# Altium PCB F1-chip.PcbDoc
Units mil, origin at the board's own origin, x right, y up, seen from the top; angles counter-clockwise.
Board outline 1181.1 x 1133.14 mil, 4 copper layers (Top Layer, GND, Signal & VCC, Bottom Layer), stack 23.756 mil thick; 61 components, 75 nets, 305 pads, 84 vias.
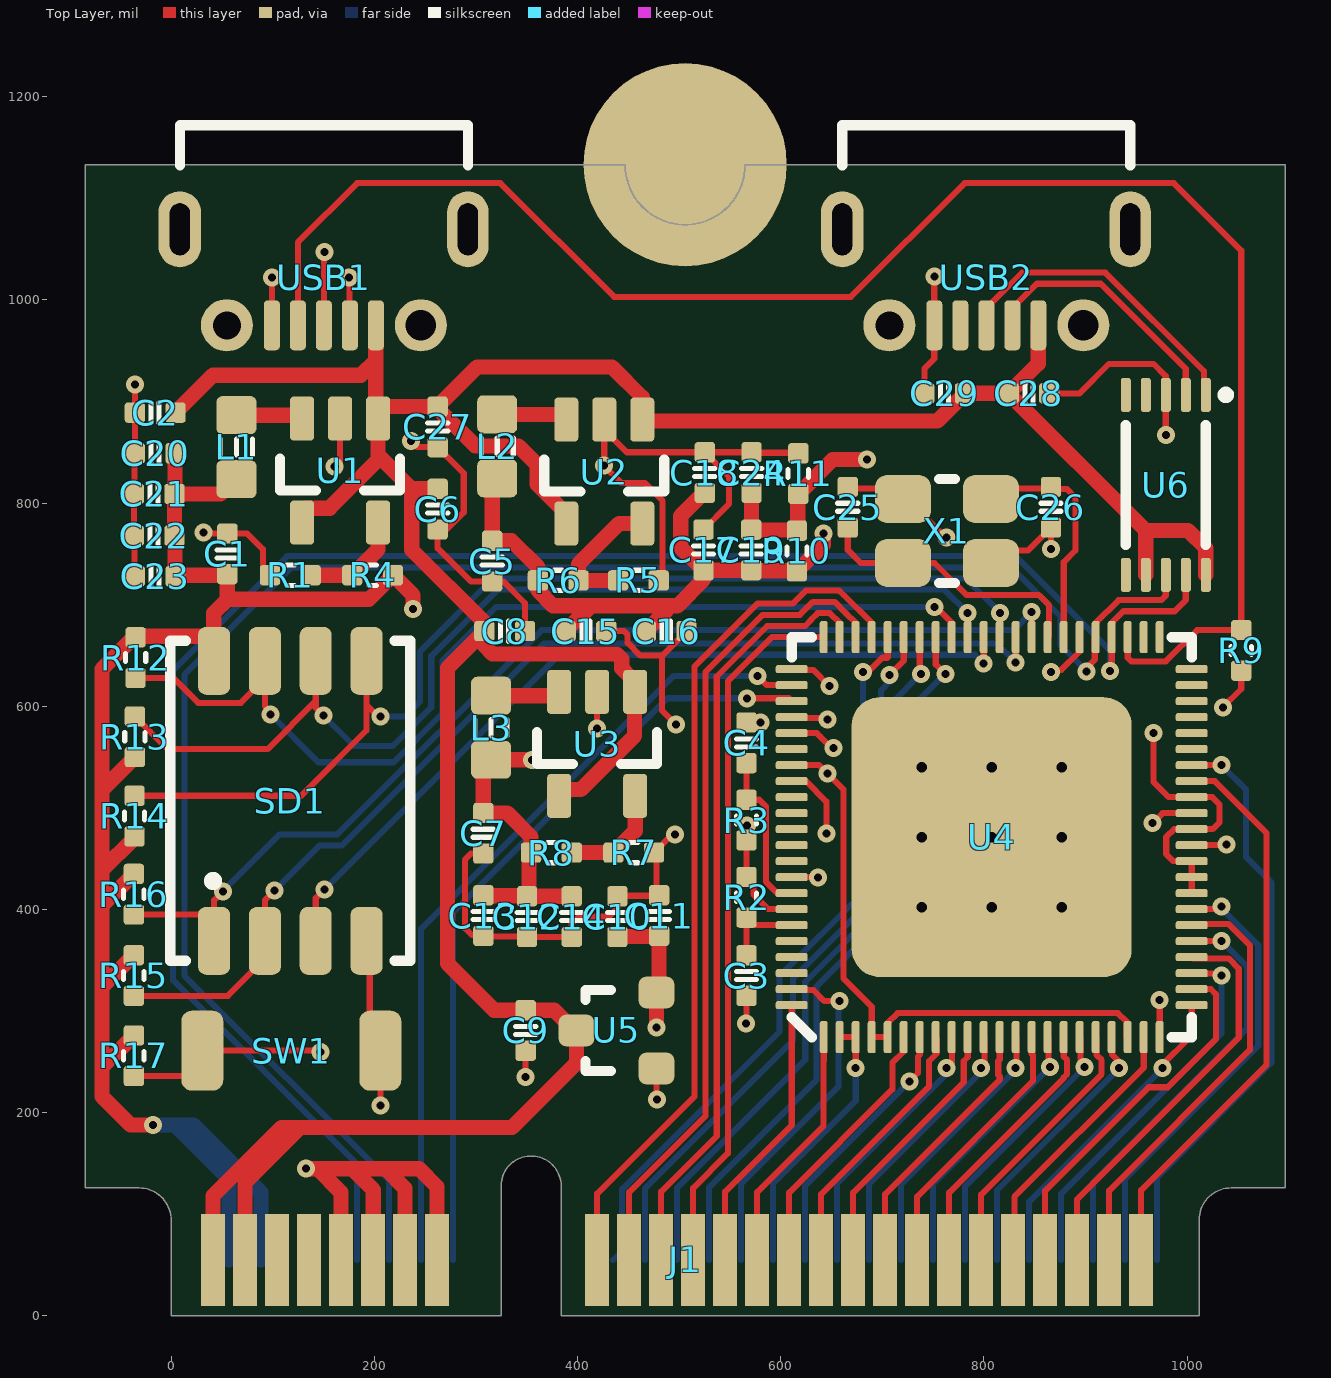
[diagram p0: Top Layer view]
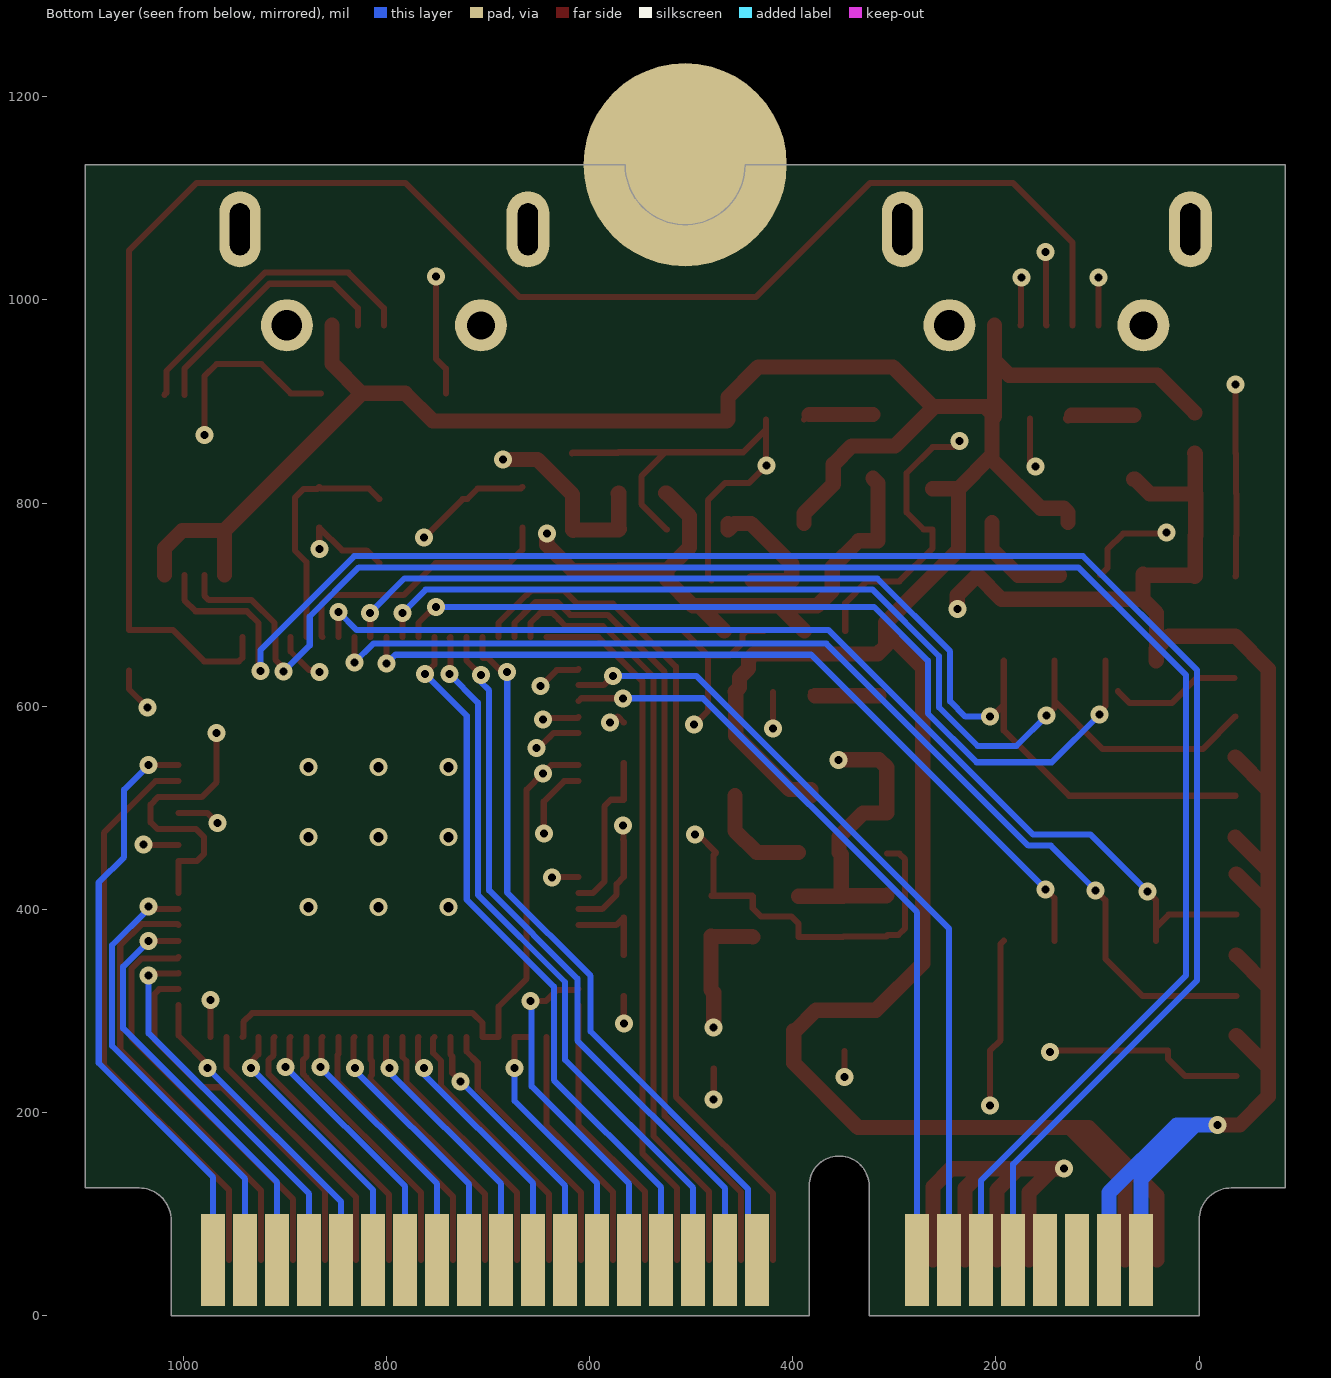
[diagram p1: Bottom Layer view, seen from below]
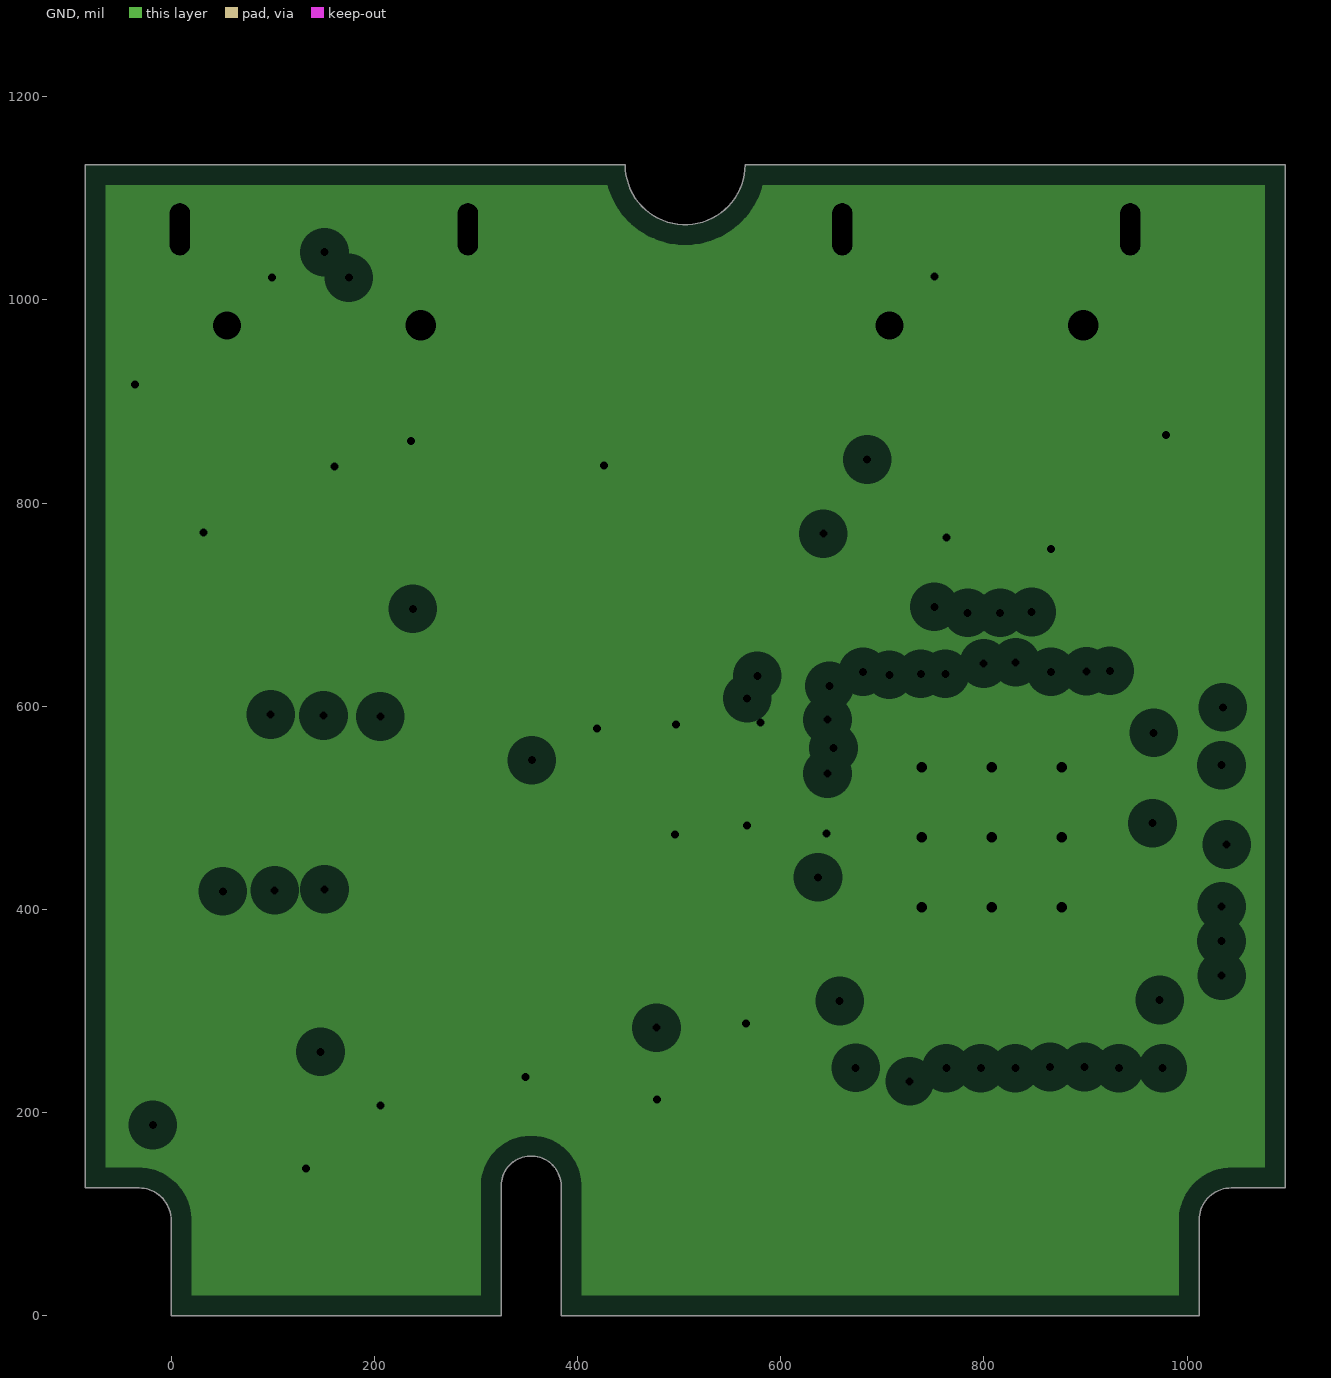
[diagram p2: GND, clearances drawn from the general rule]
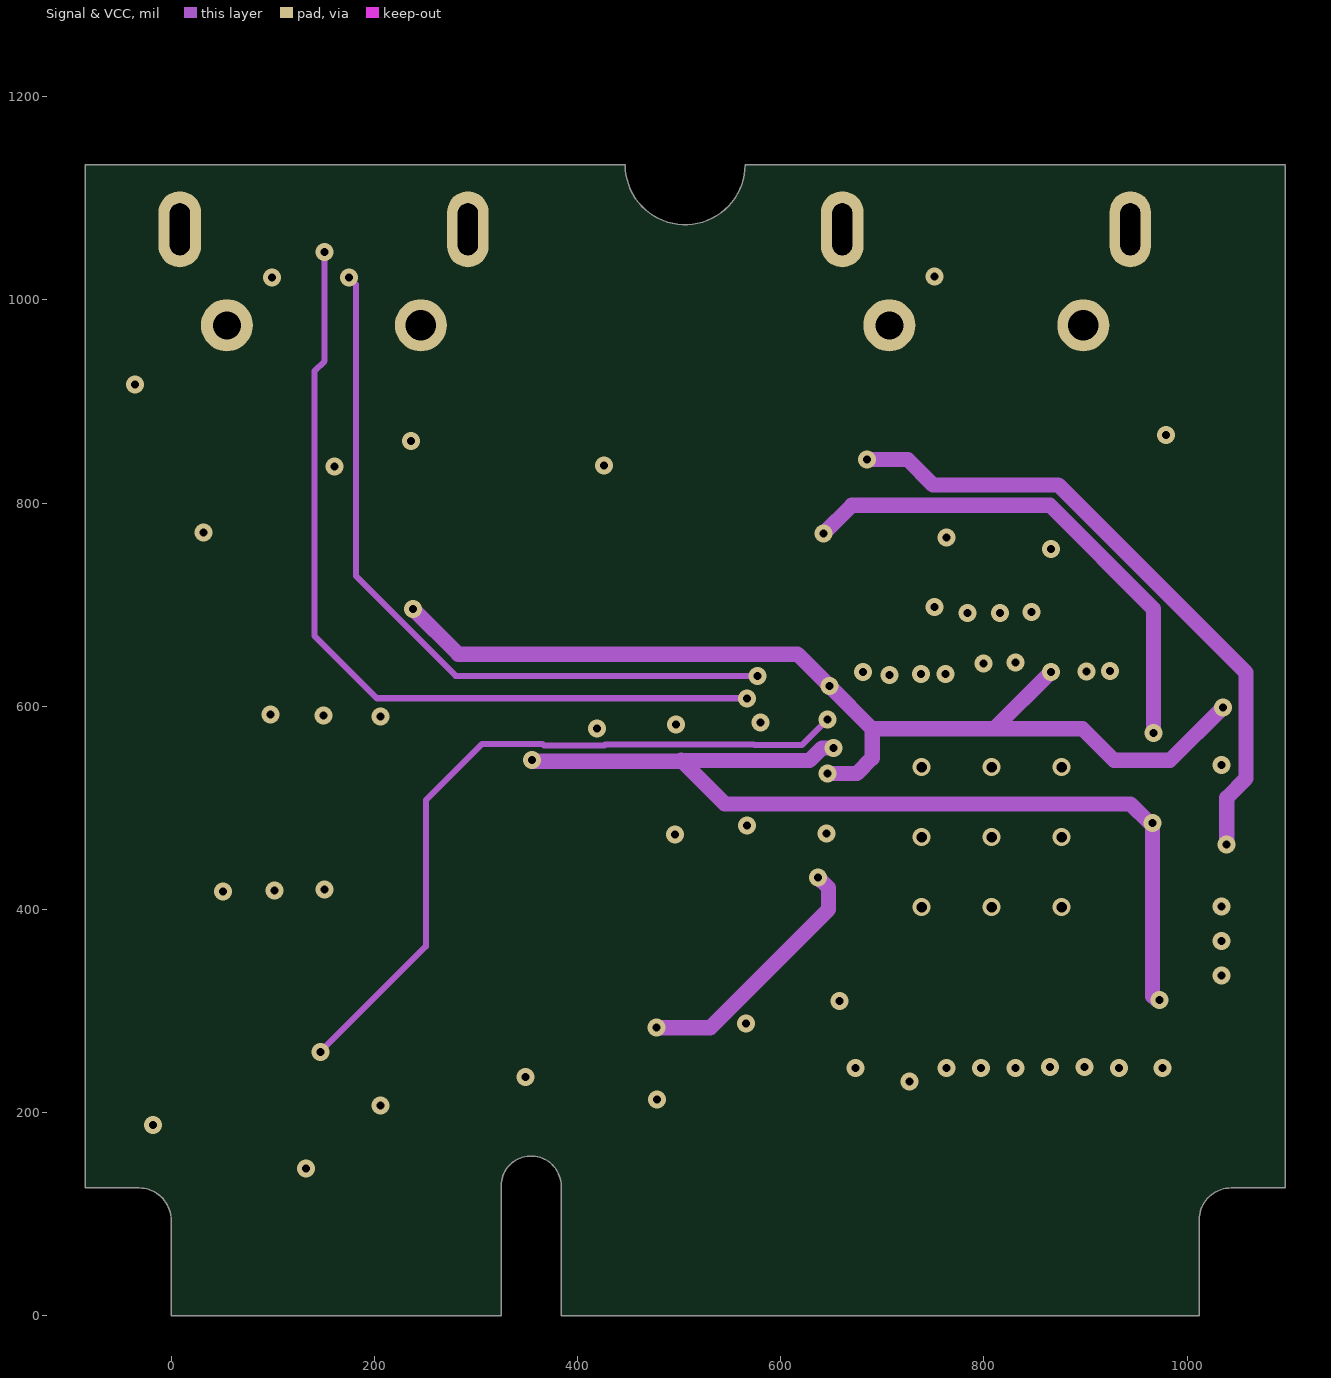
[diagram p3: Signal & VCC]

## Layer stack, top to bottom
Top Solder: solder mask 0.4, Solder Resist, Dk 3.5
Top Layer: signal copper 1.4
Dielectric 2: prepreg 2.8, PP-006, Dk 4.1
GND: plane copper 1.3778, net GND
Dielectric 1: dielectric 12.6, FR-4, Dk 4.8
Signal & VCC: signal copper 1.3778
Dielectric 3: prepreg 2.8, PP-006, Dk 4.1
Bottom Layer: signal copper 1.4
Bottom Solder: solder mask 0.4, Solder Resist, Dk 3.5

## Board outline
0,0 0,94.49 ccw(c-31.5,94.49) -31.5,125.98 -84.65,125.98 -84.65,1133.14 446.85,1133.14 ccw(c505.91,1133.14) 564.96,1133.14 1096.46,1133.14 1096.46,1131.99 1096.46,125.98 1043.31,125.98 ccw(c1043.31,94.49) 1011.81,94.49 1011.81,0 383.86,0 383.86,127.95 ccw(c354.33,127.95) 324.8,127.95 324.8,0

## Design rules (kind name [scope] priority, off if disabled: settings)
Clearance [All] p1: gap=5 ignorepadtopadclearanceinfootprint=FALSE
DiffPairsRouting [All] p1: maxlimit=10 minlimit=3.5 mostfreqgap=3.5 toplayer_minwidth=3.5 toplayer_maxwidth=20 toplayer_prefwidth=15 midlayer1_minwidth=3.5 midlayer1_maxwidth=20 midlayer1_prefwidth=15 bottomlayer_minwidth=3.5 bottomlayer_maxwidth=20 bottomlayer_prefwidth=15 maxuncoupledlength=500
HoleSize [All] p1: absolutevalues=TRUE maxlimit=100 minlimit=7.87 maxpercent=80.000 minpercent=20.000
PlaneClearance [All] p1: clearance=20
PlaneConnect [All] p1: planeconnectstyle=Direct reliefexpansion=20 reliefentries=4 reliefconductorwidth=10 reliefairgap=10
PolygonConnect [All] p1: connectstyle=Relief reliefconductorwidth=10 reliefentries=4 polygonreliefangle="90 Angle" airgapwidth=10
RoutingVias [All] p1: holewidth=7.87 width=17.72 viastyle="Through Hole" minholewidth=7.87 minwidth=17.72 maxholewidth=28 maxwidth=50
SolderMaskExpansion [All] p1: expansion=1
Width [All] p1: maxlimit=20 minlimit=3.5 preferedwidth=6
26 further rules are at their usual default settings.

## Components (designator, comment, footprint, x,y, rotation, side; value= is the part's Value field where it differs from the comment)
C1 "10uF" CAP_0402 55.33,750.12 r90 top
C2 "10uF" CAP_0402 -15.67,889.12 r180 top
C3 "10uF" CAP_0402 566.33,335.12 r270 top
C4 "10uF" CAP_0402 566.33,564.12 r90 top
C5 "10uF" CAP_0402 316,743 r270 top
C6 "10uF" CAP_0402 262.33,794.12 r270 top
C7 "10uF" CAP_0402 307.33,475.12 r270 top
C8 "10uF" CAP_0402 328.33,674.12 r0 top
C9 "4.7uF" CAP_0402 349,281 r90 top
C10 "10uF" CAP_0402 439.33,393.12 r270 top
C11 "0.1uF" CAP_0402 480.33,394.12 r270 top
C12 "0.1uF" CAP_0402 350.33,393.12 r90 top
C13 "0.1uF" CAP_0402 307.33,394.12 r90 top
C14 "0.1uF" CAP_0402 394.33,393.12 r90 top
C15 "10uF" CAP_0402 408.33,674.12 r180 top
C16 "1uF" CAP_0402 487.33,674.12 r180 top
C17 "0.1uF" CAP_0402 524,754 r270 top
C18 "0.1uF" CAP_0402 525.33,830.12 r270 top
C19 "0.1uF" CAP_0402 571,754 r270 top
C20 "0.1uF" CAP_0402 -15.67,849.12 r0 top
C21 "0.1uF" CAP_0402 -16.67,809.12 r0 top
C22 "0.1uF" CAP_0402 -16.67,768.12 r0 top
C23 "0.1uF" CAP_0402 -15.67,728.12 r0 top
C24 "0.1uF" CAP_0402 571.33,830.12 r270 top
C25 "15pF" CAP_0402 666,796 r270 top
C26 "15pF" CAP_0402 866,796 r270 top
C27 "1uF" CAP_0402 262.33,875.12 r270 top
C28 "10uF" CAP_0402 844.33,908.12 r0 top
C29 "0.1uF" CAP_0402 761.33,908.12 r180 top
J1 "mini PCI-E" "mini PCI-E" 354.33,55.12 r0 top
L1 "2.2uH" IND_0603 64.33,855.12 r270 top
L2 "2.2uH" IND_0603 321,856 r270 top
L3 "2.2uH" IND_0603 315,579 r270 top
R1 "150K" RES_0402 117.33,729.12 r0 top
R2 "200K" RES_0402 566.33,412.12 r90 top
R3 "200K" RES_0402 566.33,488.12 r270 top
R4 "680K" RES_0402 198.33,729.12 r0 top
R5 "150K" RES_0402 460,724 r180 top
R6 "470K" RES_0402 381,724 r180 top
R7 "150K" RES_0402 455.33,456.12 r180 top
R8 "150K" RES_0402 374.33,456.12 r180 top
R9 "10K" RES_0402 1053.33,655.12 r90 top
R10 "2.2K" RES_0402 616,753 r270 top
R11 "2.2K" RES_0402 617.33,829.12 r270 top
R12 "10K" RES_0402 -35,648 r90 top
R13 "10K" RES_0402 -35.67,570.12 r270 top
R14 "10K" RES_0402 -36,492 r270 top
R15 "10K" RES_0402 -36.67,335.12 r90 top
R16 "10K" RES_0402 -36.67,415.12 r90 top
R17 "10K" RES_0402 -36.67,256.12 r90 top
SD1 "SD NAND" "SD NAND" 117.33,507.12 r90 top
SW1 "贴片按钮" BUTTON2 118.33,261.12 r180 top
U1 "SY8088AAC" SY8088AAC 166.33,832.12 r270 top
U2 "SY8088AAC" SY8088AAC 426.33,831.12 r270 top
U3 "SY8088AAC" SY8088AAC 419.33,563.12 r270 top
U4 "全志F1c200s" F1c200s 807.7,471.27 r90 top
U5 "XC6206-3.0V" XC6206 477.74,281 r270 top
U6 "CH340E" CH340E 979,818 r270 top
USB1 "MicroUSB" MicroUSB 150.33,975.12 r180 top
USB2 "MicroUSB" MicroUSB 802.33,975.12 r180 top
X1 "24MHz Crystal" SMD3225 763.64,772.62 r180 top

## Footprints (in the part's own frame and the unit in brackets; to place one, negate y for a bottom-side part, rotate by r counter-clockwise, add the part's x,y. Pads: shape width x height; smd on the part's side, far side on the other; paste and mask are expansions set on the pad)
BUTTON2 [mm] "3*4*2两脚小龟贴片按钮"
  rrect50% 1.05x2 smd mask+0.076: 1(-2.225,0) 2(2.225,0)
CAP_0402 [mil] "0402 Capacitor"
  rrect30% 20x20 smd mask+2.99: 1(-20,0) 2(20,0)
  silkscreen extent -4,-10 4,10
CH340E [mm] "MSOP-10"
  rrect50% 0.85x0.25 smd mask+0.076: 1(-2.25,1) 2(-2.25,0.5) 3(-2.25,0) 4(-2.25,-0.5) 5(-2.25,-1) 6(2.25,-1) 7(2.25,-0.5) 8(2.25,0) 9(2.25,0.5) 10(2.25,1)
  silkscreen extent -2.33,-1 1.5,1.58
F1c200s [mm] "QFN-88"
  rrect50% 0.8x0.2 smd mask+0.076: 1(-5,4.2) 2(-5,3.8) 3(-5,3.4) 4(-5,3) 5(-5,2.6) 6(-5,2.2) 7(-5,1.8) 8(-5,1.4) 9(-5,1) 10(-5,0.6) 11(-5,0.2) 12(-5,-0.2) 13(-5,-0.6) 14(-5,-1) 15(-5,-1.4) 16(-5,-1.8) 17(-5,-2.2) 18(-5,-2.6) 19(-5,-3) 20(-5,-3.4) 21(-5,-3.8) 22(-5,-4.2) 45(5,-4.2) 46(5,-3.8) 47(5,-3.4) 48(5,-3) 49(5,-2.6) 50(5,-2.2) 51(5,-1.8) 52(5,-1.4) 53(5,-1) 54(5,-0.6) 55(5,-0.2) 56(5,0.2) 57(5,0.6) 58(5,1) 59(5,1.4) 60(5,1.8) 61(5,2.2) 62(5,2.6) 63(5,3) 64(5,3.4) 65(5,3.8) 66(5,4.2)
  rrect50% 0.2x0.8 smd mask+0.076: 23(-4.2,-5) 24(-3.8,-5) 25(-3.4,-5) 26(-3,-5) 27(-2.6,-5) 28(-2.2,-5) 29(-1.8,-5) 30(-1.4,-5) 31(-1,-5) 32(-0.6,-5) 33(-0.2,-5) 34(0.2,-5) 35(0.6,-5) 36(1,-5) 37(1.4,-5) 38(1.8,-5) 39(2.2,-5) 40(2.6,-5) 41(3,-5) 42(3.4,-5) 43(3.8,-5) 44(4.2,-5) 67(4.2,5) 68(3.8,5) 69(3.4,5) 70(3,5) 71(2.6,5) 72(2.2,5) 73(1.8,5) 74(1.4,5) 75(1,5) 76(0.6,5) 77(0.2,5) 78(-0.2,5) 79(-0.6,5) 80(-1,5) 81(-1.4,5) 82(-1.8,5) 83(-2.2,5) 84(-2.6,5) 85(-3,5) 86(-3.4,5) 87(-3.8,5) 88(-4.2,5)
  rrect20% 7x7 smd mask+0.076: 89(0,0)
  silkscreen extent -5,-5 5,5
IND_0603 [mm] "0603 Inductor"
  rrect30% 0.95x1 smd mask+0.076: 1(-0.8,0) 2(0.8,0)
  silkscreen extent -0.2,-0.4 0.2,0.4
MicroUSB [mm] "MicroUSB"
  oval 1.03x1.9 hole 1.3 slot 0.5 at 0 deg mask+0.076: 0(-3.6,-2.4)
  round 1.3 hole 0.762 mask+0.076: 0(-2.425,0)
  round 1.3 hole 0.7 mask+0.076: 0(2.425,0)
  oval 1.07x1.9 hole 1.3 slot 0.5 at 0 deg mask+0.076: 0(3.6,-2.4)
  rrect50% 0.4x1.25 smd mask+0.076: 1(-1.3,0) 2(-0.65,0) 3(0,0) 4(0.65,0) 5(1.3,0)
  silkscreen extent -3.6,-5 3.6,-4
"mini PCI-E" [mm] "mini PCI-E"
  rect 0.6x2.3 smd mask+0.076: 1(-7.95,0) 3(-7.15,0) 5(-6.35,0) 7(-5.55,0) 9(-4.75,0) 11(-3.95,0) 13(-3.15,0) 15(-2.35,0) 17(1.65,0) 19(2.45,0) 21(3.25,0) 23(4.05,0) 25(4.85,0) 27(5.65,0) 29(6.45,0) 31(7.25,0) 33(8.05,0) 35(8.85,0) 37(9.65,0) 39(10.45,0) 41(11.25,0) 43(12.05,0) 45(12.85,0) 47(13.65,0) 49(14.45,0) 51(15.25,0)
  rect 0.6x2.3 smd far side mask+0.076: 2(-7.55,0) 4(-6.75,0) 6(-5.95,0) 8(-5.15,0) 10(-4.35,0) 12(-3.55,0) 14(-2.75,0) 16(-1.95,0) 16(-1.95,0) 18(2.05,0) 18(2.05,0) 20(2.85,0) 22(3.65,0) 24(4.45,0) 26(5.25,0) 28(6.05,0) 30(6.85,0) 32(7.65,0) 34(8.45,0) 36(9.25,0) 38(10.05,0) 40(10.85,0) 42(11.65,0) 44(12.45,0) 46(13.25,0) 48(14.05,0) 50(14.85,0) 52(15.65,0)
RES_0402 [mil] "0402 Resistor"
  rrect30% 20x20 smd mask+2.99: 1(-20,0) 2(20,0)
  silkscreen extent -4,-10 4,10
"SD NAND" [mm] "SD NAND"
  rrect50% 1.7x0.8 smd mask+0.076: 1(-3.5,1.905) 1(-3.5,1.905) 2(-3.5,0.635) 3(-3.5,-0.635) 4(-3.5,-1.905) 5(3.5,-1.905) 5(3.5,-1.905) 6(3.5,-0.635) 7(3.5,0.635) 8(3.5,1.905)
  silkscreen extent -4,-3 4,3
SMD3225 [mm] "SMD3225 Crystal"
  rrect50% 1.4x1.2 smd mask+0.076: 1(-1.1,-0.8) 2(1.1,-0.8) 3(1.1,0.8) 4(-1.1,0.8)
  silkscreen extent -0.2,-1.3 0.2,1.3
SY8088AAC [mm] "SY8088AAC"
  rrect30% 1.1x0.6 smd mask+0.07: 1(-1.3,0.95) 2(-1.3,0) 3(-1.3,-0.95) 4(1.3,-0.95) 5(1.3,0.95)
  silkscreen extent -0.3,-1.5 0.5,1.5
XC6206 [mm] "SOT23"
  rrect50% 0.8x0.9 smd: 1(0.95,0) 2(-0.95,0) 3(0,-2)
  silkscreen extent -1.02,-1.78 1.02,-1.14

## Part data
C1 C2 C3 C4 C5 C6 C7 C8 C10 C15 C28: library part CAP_0402_10uF, "0402"
C9: library part CAP_0402_4.7uF, "0402"
C11 C12 C13 C14 C17 C18 C19 C20 C21 C22 C23 C24 C29: library part CAP_0402_0.1uF, "0402"
C16 C27: library part CAP_0402_1uF, "0402"
C25 C26: library part CAP_0402_15pF, "0402"
L1 L2 L3: library part IND_0603_2.2uH, "0603"
R1 R5 R7 R8: library part RES_0402_150K, "0402"
R2 R3: library part RES_0402_200K, "0402"
R4: library part RES_0402_680K, "0402"
R6: library part RES_0402_470K, "0402"
R9 R12 R13 R14 R15 R16 R17: library part RES_0402_10K, "0402"
R10 R11: library part RES_0402_2.2K, "0402"
SW1: "3*4*2两脚小龟贴片按钮"
U1 U2 U3: "SOT23-5"
U4: library part F1c200s, "MQFN-88"
U5: "SOT23-3"
U6: "MSOP-10"
X1: "SMD3225"

## Free pads (board coordinates)
  round 200 smd: PAD(505.91,1133.14)
  round 200 smd far side: PAD(505.91,1133.14)

## Via types
v1: diameter 17.72, hole 7.87, Top Layer to Bottom Layer, 75 vias
v2: diameter 17.72, hole 10, Top Layer to Bottom Layer, tented both sides, 9 vias

## Nets (pads, with @x,y where several pads share a name; then routed paths per layer and width w, separated by ;. In a path a pad name is that pad's centre, name@x,y a point inside that pad or via, vN(x,y) a via of type N, cw(c..) or ccw(c..) an arc to the next point about the centre after c; other vN are vias at no path point)
5VIN: C2.1 C6.1 C8.1 C9.2 C27.1 C28.1 C29.1 J1.1 J1.3 U1.1 U1.4 U2.1 U2.4 U3.1 U3.4 U5.3 U6.7 U6.10 USB1.1 USB2.1 | length 3479.3
  Top Layer w15: C2.1 41.21,926 187,926 201.51,940.51 ; J1.1 41.34,118.34 108.64,185.64 127,185.64 ; J1.3 72.83,131.23 127,185.4 127,185.64 ; U1.4 128.93,790.78 133.24,795.09 156.09,795.09 203.73,842.73 203.73,847.27 ; USB1.1 201.51,940.51 ; U1.1@203.73,888.31 210.54,895.12 C27.1 ; C6.1 236.88,814.12 ; U3.4 381.93,518.28 403.28,518.28 456,571 456,613.57 U3.1 452.42,618.61 452.42,628.45 443.64,637.23 443.64,646.33 438.35,651.62 316.38,651.62 308.33,659.67 C8.1 ; U2.4 388.93,789.78 360,818.71 360,838.28 341.99,856.3 299.42,856.3 262.33,893.39 C27.1 ; USB2.1 853.51,937.3 C28.1 ; U6.7 959.31,773.13 ; U6.10 1018.37,755.63 1000.87,773.13 959.31,773.13 ; 127,185.64 335.64,185.64 399,249 U5.3 397.03,281 377.03,301 C9.2 318,301 272,347 272,637.79 C8.1 ; 201.51,940.51 201.51,885.52 U1.1 203.73,847.27 ; 203.73,847.27 236.88,814.12 ; 236.88,814.12 236.88,754.12 308.33,682.67 C8.1 ; C27.1 301.21,934 434,934 463.73,904.27 U2.1 465.03,881 754.21,881 C29.1 C28.1 ; C28.1 959.31,773.13
+1V1: C7.1 C12.2 C13.2 C14.2 L3.2 R8.2 U4.22 U4.35 U4.71 | length 1397.5
  Top Layer w6: U4.71 635.53,573.63 639.02,570.14 639.09,570.14 650.23,559 v1(652,559) ; v1(966,485) 975.89,494.89 U4.35 ; U4.22 v1(973,311)
  Top Layer w15: C13.2 307.83,413.62 C12.2@349.83,413.62 ; v1(355,547) 354.5,547.5 L3.2 307.33,539.83 C7.1 330.88,495.12 354.33,471.67 R8.2 352.33,454.12 352.33,416.12 C12.2@349.83,413.62 ; C14.2 C12.2 C12.2@349.83,413.62
  Signal & VCC w15: v1(355,547) 356.03,545.97 500.97,545.97 502,547 502.36,546.64 ; v1(652,559) 640.79,559 628.44,546.64 502.36,546.64 ; v1(973,311) 970.36,311 966.85,314.51 966,314.51 v1(966,485) 963.36,485 944.36,504 545,504 502.36,546.64
+2V5: C5.1 C15.2 C16.2 C17.2 C18.2 C19.2 L2.2 R6.2 R10.2 U4.30 U4.31 U4.32 U4.34 U4.36 | length 1412.1
  Top Layer w6: v1(967,574) 967,525.41 981.78,510.64 U4.36 1024.77,510.64 1032,503.41 1032,486 1025.14,479.14 U4.34 987.14,479.14 979.49,471.49 979.49,454.51 986.35,447.65 U4.32 U4.31 U4.30
  Top Layer w15: L2.2 316,819.5 C5.1 335,763 361,737 R6.2 361,714 376,699 413.21,699 ; C15.2 413.21,699 ; C16.2 488,694.79 488,699 ; C18.2 524.2,810.12 501.5,787.42 501.5,756.5 C17.2 ; v1(642,770) 642,759 R10.2 615.5,733.5 571.5,733.5 C19.2 C17.2 ; 413.21,699 488,699 ; 488,699 498.21,699 524,724.79 C17.2
  Signal & VCC w15: v1(642,770) 670,798 865,798 967,696 v1(967,574)
+3V0: C10.2 C11.2 U4.80 U5.2 | length 412.2
  Top Layer w6: U4.80 636.6,431.9 v1(636.72,431.78)
  Top Layer w15: C10.2 439.83,373.62 479.83,373.62 C11.2 480.33,320.99 U5.2 v1(477.74,283.74)
  Signal & VCC w15: v1(477.74,283.74) 530.74,283.74 647,400 647,421.5 v1(636.72,431.78)
+3V3: C1.1 C20.2 C21.2 C22.2 C23.2 J1.2 J1.4 L1.2 R4.2 R9.1 R12.2 R13.2 R14.2 R15.2 R16.2 R17.2 SD1.8 U4.4 U4.5 U4.20 U4.50 U4.67 U4.73 | length 3527.3
  Top Layer w6: U4.73 637.87,542.13 v1(646,534) 661.87,518.13 661.87,332.13 689.59,304.41 U4.4 U4.5 705.34,288.52 714.99,298.17 931.91,298.17 940.62,289.45 940.62,275.36 U4.20 ; U4.67 611.79,635.69 632.31,635.69 v1(648,620) ; v1(866,634) 867.87,635.87 876.16,635.87 894.31,654.02 U4.50 ; v1(1035.24,599) 1053.33,617.09 R9.1
  Top Layer w15: -67.89,438.89 R14.2@-35.67,471.12 ; -67.39,324.39 R15.2 ; -66.89,404.89 R16.2 ; R17.2 -67.79,245 -68,245 ; R13.2 -68,517.79 ; v1(-18,188) -40,188 -68,216 -68,245 ; C20.2 3.83,848.62 3.83,809.62 C21.2 ; L1.2 63.02,823.62 48.51,809.12 C21.2 ; v1(238,696) 238,709.45 R4.2 194.54,705.33 55.33,705.33 ; -68,245 -68,517.79 ; -68,517.79 -68,636.79 -35.67,669.12 29.95,669.12 SD1.8@42,657.07 ; C21.2 C22.2 3.83,767.62 3.83,728.62 C23.2 5.33,729.12 54.33,729.12 C1.1 55.33,705.33 ; SD1.8@42,657.07 42.33,656.74 SD1.8 42,645.24 SD1.8@42,657.07 ; SD1.8@42,657.07 42,692 55.33,705.33
  Signal & VCC w15: v1(238,696) 282.64,651.36 616.64,651.36 v1(648,620) 690,578 ; v1(646,534) 675,534 690,549 690,578 ; v1(866,634) 810,578 ; v1(1035.24,599) 983.24,547 928,547 897,578 810,578 ; 690,578 810,578
  Bottom Layer w15: v1(-18,188) 4,188 ; J1.2 57.09,134.91 4,188 ; J1.4 88.58,121.42 22,188 4,188
D+: U6.1 USB2.3 | length 309.9
  Top Layer w6: USB2.3 802.33,991.85 837.48,1027 919.56,1027 1016.45,930.11 1016.45,908.5 U6.1
D-: U6.2 USB2.2 | length 257.9
  Top Layer w6: USB2.2 827.92,991.85 852.07,1016 915,1016 998.68,932.31 U6.2
DRAM_VREF_33: C19.1 C24.2 R10.1 R11.2 U4.33 | length 873.2
  Top Layer w6: U4.33 1004.85,463.7 1038.7,463.7 v1(1039,464)
  Top Layer w15: C19.1@570.5,774.5 C19.1 ; C24.2@571.83,809.62 C24.2 571.17,809.95 571.17,774.17 C19.1 ; v1(685,843) 651.21,843 R11.2 616.67,808.45 616.67,773.67 R10.1 615.5,773.5 571.5,773.5 C19.1
  Signal & VCC w15: v1(685,843) 725,843 750,818 873.28,818 1058,633.28 1058,529 1039,510 v1(1039,464)
GND: C1.2 C2.2 C3.2 C4.2 C5.2 C6.2 C7.2 C8.2 C9.1 C10.1 C11.1 C12.1 C13.1 C14.1 C15.1 C16.1 C17.1 C18.1 C20.1 C21.1 C22.1 C23.1 C24.1 C25.1 C26.2 C27.2 C28.2 C29.2 J1.9 J1.11 J1.13 J1.15 R1.1 R2.2 R3.2 R5.1 R7.1 R11.1 SD1.4 SW1.1 U1.2 U2.2 U3.2 U4.74 U4.82 U4.89 U5.1 U6.3 USB1.0 USB1.5 USB2.0 USB2.5 X1.2 X1.4 | length 3255.4
  Top Layer w6: C23.1 -36.17,728.62 -36.17,767.62 C22.1 C21.1 -36.17,809.62 -36.17,848.62 C20.1 C2.2 v1(-35.67,916.67) ; v1(32,771) 32.88,770.12 C1.2 74.88,770.12 90.33,754.67 90.33,736.12 R1.1 ; USB1.5 v1(99.15,1022.15) ; v1(161,836) 162,836 166.33,840.33 U1.2 ; SD1.4 195.46,366.19 195.46,271.58 SW1.1 206,261.05 v1(206,207) ; v1(236,861) 241.88,855.12 C27.2 288,829.45 288,791 271.12,774.12 C6.2 262.33,755.67 295,723 C5.2 327,723 348.33,701.67 C8.2 ; C7.2 295.12,455.12 289.33,449.33 289.33,381.67 296,375 306.45,375 C13.1 307.83,373.62 349.83,373.62 C12.1 C14.1 394.33,386.33 401,393 431,393 439.33,401.33 C10.1 439.83,413.62 479.83,413.62 477.83,415.62 477.83,453.62 R7.1 493.21,474 v1(496,474) ; v1(349,235) C9.1 ; v1(419.33,578.33) U3.2 ; U2.2 U2.2@426.33,872.46 ; C15.1 445.82,674.12 449.33,670.6 449.33,662.56 461.89,650 483.21,650 ; U5.1 477.74,213.26 v1(478,213) ; R5.1 483.54,727.54 483.54,802.83 466.37,820 443,820 v1(426,837) 426.33,837.33 U2.2@426.33,872.46 ; v1(497,582) 483.21,595.79 483.21,650 ; C16.1 483.21,650 ; C17.1 549,799 549,826.45 C18.1 ; v1(566,288) 566.33,288.33 C3.2 ; C4.2 572.33,590.12 578.45,584 v1(580,584) ; v1(567,483) 566.67,482.67 566.67,469.12 567,468.79 R3.2 R2.2 573.33,425.12 573.33,414.67 587.6,400.4 U4.82 ; U4.74 624.95,526.39 645,506.33 v1(645,475) v1@645,481 ; R11.1 616.83,849.62 571.83,849.62 C24.1 C18.1 ; C25.1 667.54,814.46 709.98,814.46 X1.2 724.88,804.12 724.88,803.81 762.69,766 v1(763,766) ; C29.2 741.33,932.33 751.15,942.15 USB2.5 v1(751.15,1023.15) ; X1.4 819.32,753.5 843.5,753.5 C26.2 v1(866,755) ; C28.2 894.12,908.12 923,937 967,937 979,925 U6.3 v1(979,867) ; U2.2@426.33,872.46 448.67,850.12 C18.1
  Top Layer w15: v1(133,145) 144,145 ; J1.9 167.32,121.68 144,145 ; J1.11 199,55.3 199,124 178,145 ; J1.13 230.31,125.69 211,145 ; J1.15 261.81,127.19 244,145 211,145 ; 144,145 178,145 ; 178,145 211,145
  other v2: 738.8,402.37 807.7,402.37 876.6,402.37 738.8,471.27 807.7,471.27 876.6,471.27 738.8,540.17 807.7,540.17 876.6,540.17
HOSCI: C26.1 U4.51 X1.1 | length 234.4
  Top Layer w6: X1.1 817.29,814.46 864.47,814.46 C26.1 868,814 881.49,814 890,805.49 890,753.42 878.57,741.99 U4.51
HOSCO: C25.2 U4.52 X1.3 | length 274.8
  Top Layer w6: C25.2 666,754 678.87,741.13 751.37,741.13 782.99,709.5 839.8,709.5 840.09,709.79 854.05,709.79 863.93,699.91 863.93,669.23 U4.52
HPCOM: J1.28 U4.2 U4.3 | length 268.7
  Top Layer w6: U4.2 U4.3 v1(673.84,244.16)
  Bottom Layer w6: J1.28 592.52,130.52 673.84,211.84 v1(673.84,244.16)
HPL: J1.27 U4.1 | length 246.5
  Top Layer w6: J1.27 576.77,121.77 642.22,187.22 642.22,250.67 642.35,250.8 U4.1
HPR: J1.25 U4.88 | length 278
  Top Layer w6: J1.25 545.27,122.27 610.85,187.85 U4.88
I2C_CL: J1.52 U4.38 | length 583.3
  Top Layer w6: U4.38 v1(1033.87,542.13)
  Bottom Layer w6: J1.52 970.47,136.47 1083,249 1083,426.68 1058,451.68 1058,518 v1(1033.87,542.13)
I2C_DA: J1.51 U4.37 | length 566
  Top Layer w6: J1.51 954.72,123.72 1078,247 1078,475.55 1027.16,526.39 U4.37
MICIN: J1.26 U4.87 | length 347
  Top Layer w6: U4.87 611.79,320.73 632.27,320.73 643,310 v1(658,310)
  Bottom Layer w6: J1.26 561.02,130.02 656.98,225.98 656.98,308.98 v1(658,310)
NetC3_1: C3.1 R2.1 U4.83 | length 84.6
  Top Layer w6: C3.1 R2.1 573.79,384.65 U4.83
NetC4_1: C4.1 R3.1 U4.81 | length 162
  Top Layer w6: C4.1 R3.1 578.88,508.12 585.41,501.59 585.41,427.49 596.75,416.15 U4.81
NetL1_1: L1.1 U1.3 | length 66
  Top Layer w10: U1.3@125.61,886.61 U1.3
  Top Layer w15: L1.1 U1.3@125.61,886.61
NetL2_1: L2.1 U2.3 | length 70.1
  Top Layer w6: L2.1 L2.1@321.09,887.41 ; U2.3@383.82,887.41 U2.3
  Top Layer w15: L2.1@321.09,887.41 U2.3@383.82,887.41
NetL3_1: L3.1 U3.3 | length 68.5
  Top Layer w6: U3.3@378.13,610.5 U3.3
  Top Layer w15: L3.1 U3.3@378.13,610.5
NetR1_2: R1.2 R4.1 U1.5 | length 103.3
  Top Layer w15: R1.2 R4.1 203.73,754.52 U1.5
NetR5_2: R5.2 R6.1 U2.5 | length 143.3
  Top Layer w15: R5.2 R6.1 401,740 441,780 457.33,780 463.73,773.6 U2.5
NetR7_2: R7.2 R8.1 U3.5 | length 105.7
  Top Layer w15: R8.1 R7.2 456.73,477.52 U3.5
PD0: J1.29 U4.6 | length 266
  Top Layer w6: J1.29 608.27,121.27 710,223 710,249.23 721.09,260.32 U4.6
PD1: J1.30 U4.7 | length 266
  Top Layer w6: v1(727,231) 735.14,239.14 735.14,255.54 736.83,257.23 U4.7
  Bottom Layer w6: J1.30 624.02,128.02 v1(727,231)
PD2: J1.31 U4.8 | length 267.2
  Top Layer w6: J1.31 639.76,119.92 746.14,226.3 746.14,250.98 754,258.84 754,273 U4.8
PD3: J1.32 U4.9 | length 266.3
  Top Layer w6: v1(763,244) 768.67,249.67 768.67,274.08 U4.9
  Bottom Layer w6: J1.32 655.51,130.51 763,238 v1(763,244)
PD4: J1.33 U4.10 | length 266
  Top Layer w6: J1.33 671.26,121.27 780.14,230.15 780.14,250.98 784.08,254.92 U4.10
PD5: J1.34 U4.11 | length 269.3
  Top Layer w6: v1@799,242 v1(797,244) 800.41,247.41 800.41,273.83 U4.11
  Bottom Layer w6: J1.34 687.01,130.01 797,240 v1(797,244)
PD6: J1.35 U4.12 | length 267.2
  Top Layer w6: J1.35 702.76,119.92 815.57,232.73 815.57,235.58 814.14,237.02 814.14,250.98 815.57,252.42 U4.12
PD7: J1.36 U4.13 | length 266.7
  Top Layer w6: v1(831,244) 832.16,245.16 832.16,273.58 U4.13
  Bottom Layer w6: J1.36 718.5,129.5 831,242 v1(831,244)
PD8: J1.37 U4.14 | length 266.9
  Top Layer w6: J1.37 734.25,117.41 848.14,231.3 848.14,251.98 848.14,256.7 847.07,257.77 U4.14
PD9: J1.38 U4.15 | length 267.8
  Top Layer w6: U4.15 863.76,273.48 863.76,246.24 v1(865,245)
  Bottom Layer w6: J1.38 750,130 v1(865,245)
PD10: J1.39 U4.16 | length 268.8
  Top Layer w6: J1.39 765.75,121.27 878.57,234.09 878.57,234.73 881.86,238.02 881.86,251.98 878.57,255.27 U4.16
PD11: J1.40 U4.17 | length 273.7
  Top Layer w6: U4.17 895.25,273.48 895.25,248.75 v1(899,245) 899,244 v1@897,242
  Bottom Layer w6: J1.40 781.5,127.5 v1(899,245)
PD12: J1.41 U4.18 | length 270.8
  Top Layer w6: J1.41 797.24,119.4 915.86,238.02 915.86,251.98 911,256.84 911,273.48 U4.18
PD13: J1.42 U4.19 | length 276.4
  Top Layer w6: U4.19 925.97,274.26 925.97,257.43 933,250.4 v1(933,244) 930,244 v1@929,243
  Bottom Layer w6: J1.42 812.99,123.99 v1(933,244)
PD14: J1.43 U4.21 | length 272
  Top Layer w6: J1.43@830,55.12 830,117.16 957.31,244.47 U4.21
PD15: J1.44 U4.23 | length 319.8
  Top Layer w6: v1(976,244) 974.74,244 973.61,245.13 1004.55,276.07 U4.23
  Bottom Layer w6: J1.44 844.49,112.49 v1(976,244)
PD16: J1.45 U4.24 | length 368.1
  Top Layer w6: J1.45 860.24,123.24 962.13,225.13 980.97,225.13 1028.3,272.46 1028.3,316.86 1023.5,321.66 U4.24
PD17: J1.46 U4.25 | length 375.8
  Top Layer w6: U4.25 1004.76,337.21 1031.79,337.21 v1(1034,335)
  Bottom Layer w6: J1.46 875.98,120.14 1034,278.16 v1(1034,335)
PD18: J1.47 U4.26 | length 403.7
  Top Layer w6: J1.47 891.73,114.73 1050.86,273.86 1050.86,341.98 1040.79,352.05 1005.66,352.05 U4.26
PD19: J1.48 U4.27 | length 416.3
  Top Layer w6: U4.27 v1(1033.91,368.91)
  Bottom Layer w6: J1.48 907.48,131.48 1059,283 1059,343.81 v1(1033.91,368.91)
PD20: J1.49 U4.28 | length 433.6
  Top Layer w6: J1.49 923.23,123.23 1061.86,261.86 1061.86,364.8 1040.89,385.76 1005.66,385.76 U4.28
PD21: J1.50 U4.29 | length 447.6
  Top Layer w6: U4.29 1004.85,400.7 1031.7,400.7 v1(1034,403)
  Bottom Layer w6: J1.50 938.98,134.98 1070,266 1070,365 1034,401 v1(1034,403)
PE3: U4.46
PE4: U4.45
PE5: U4.44
PE6: U4.43
PE7: U4.42
PE8: U4.41
PE9: U4.40
PE10: U4.39
RESET: R17.1 SW1.2 U4.70 | length 955.5
  Top Layer w6: R17.1 13.62,236.12 30.73,253.23 SW1.2 145.88,261.12 v1(147,260) ; U4.70 611.79,588.44 644.56,588.44 v1(646,587)
  Signal & VCC w6: v1(147,260) 250.71,363.71 250.71,507.71 305.87,562.87 365.68,562.87 367.08,561.47 426.31,561.47 427.34,562.5 573.66,562.5 574.02,562.14 621.14,562.14 v1(646,587)
RXD: J1.12 U4.49 U6.8 | length 1802.1
  Top Layer w6: v1(901,634.5) 901,638 909.13,646.13 909.13,667.18 U4.49 910.06,682.22 932.53,704.68 974.68,704.68 979,709 U6.8
  Bottom Layer w6: J1.12 214.57,133.43 13,335 13,631 118.86,736.86 826.98,736.86 875.39,688.45 875.39,660.11 v1(901,634.5)
SDC0_CLK: SD1.3 U4.56 | length 829.6
  Top Layer w6: SD1.3 142.33,411.33 v1(151,420) ; U4.56 v1(799.83,642.17) v1@801.17,642.17
  Bottom Layer w6: v1(151,420) 381.86,650.86 791.14,650.86 v1(799.83,642.17)
SDC0_CMD: R14.1 SD1.5 U4.55 | length 1092.9
  Top Layer w6: R14.1 128,512 192.33,576.33 192.33,644.91 SD1.5@192.33,627.2 ; 192.33,601.67 204,590 v1(206,590) ; U4.55 815.79,668.33 815.79,691.79 v1(816,692)
  Bottom Layer w6: v1(206,590) 230,590 245,605 245,654.11 316.75,725.86 782.14,725.86 v1(816,692)
SDC0_D0: R13.1 SD1.6 U4.57 | length 1041.2
  Top Layer w6: R13.1 -3.55,558 95,558 142.33,605.33 ; SD1.6 142.33,605.33 ; v1(150,591) 142.33,598.67 142.33,605.33 ; v1(784,692) 784.04,691.96 U4.57 U4.57
  Bottom Layer w6: v1(150,591) 180,561 218,561 256,599 256,649.56 321.3,714.86 761.14,714.86 v1(784,692)
SDC0_D1: R12.1 SD1.7 U4.58 | length 989.4
  Top Layer w6: R12.1 2.11,628 26.66,603.45 68.58,603.45 SD1.7@80,614.87 ; SD1.7 92.33,600.31 98,594.64 v1(98,592) ; v1(751.13,698) 752.55,698 768.33,682.22 U4.58
  Bottom Layer w6: v1(98,592) 145,545 219,545 267,593 267,645 320,698 v1(751.13,698)
SDC0_D2: R16.1 SD1.1 U4.53 | length 1071.2
  Top Layer w6: R16.1 29.95,395.12 SD1.1@42.33,382.74 ; SD1.1@42.33,369.32 SD1.1@42.33,382.74 ; v1(51,418) 42.33,409.33 SD1.1@42.33,382.74 ; U4.53 v1(847.07,692.93)
  Bottom Layer w6: v1(51,418) 107,474 163.56,474 364.7,675.14 829.28,675.14 v1(847.07,692.93)
SDC0_D3: R15.1 SD1.2 U4.54 | length 1077.9
  Top Layer w6: R15.1 55.84,315.12 92.33,351.61 SD1.2 92.33,409.33 v1(102,419) ; v1(831.32,643.32) U4.54
  Bottom Layer w6: v1(102,419) 146,463 168.11,463 366.97,661.86 812.79,661.86 v1(831.32,643.32)
SPI0_CLK: J1.24 U4.59 | length 713.2
  Top Layer w6: U4.59 752.58,641.42 v1(762,632)
  Bottom Layer w6: J1.24 529.53,126.53 635.13,232.13 635.13,324.15 720.8,409.83 720.8,590.8 v1(762,632)
SPI0_CS: J1.22 U4.60 | length 714.2
  Top Layer w6: U4.60@737.77,667.18 U4.60 736.83,633.17 v1(738,632)
  Bottom Layer w6: J1.22 498.03,126.03 624.13,252.13 624.13,328.71 709.8,414.38 709.8,603.8 v1(738,632)
SPI0_MISO: J1.20 U4.61 | length 718.4
  Top Layer w6: v1(707,631) 721.09,645.09 U4.61
  Bottom Layer w6: J1.20 466.53,125.53 612,271 612,332.14 698.8,418.94 698.8,615.8 707,624 v1(707,631)
SPI0_MOSI: J1.18 U4.62 | length 730.8
  Top Layer w6: v1(681,634) 686.16,634 700.02,647.86 704.86,647.86 705.34,648.34 U4.62
  Bottom Layer w6: J1.18@435.04,55.12 443.85,63.93 443.85,124.85 599,280 599,334.69 681,416.69 v1(681,634)
SPI1_CLK: J1.19 U4.64 | length 809
  Top Layer w6: J1.19 450.79,121.79 526,197 526,633.95 582.16,690.12 618.94,690.12 631.69,702.87 653,702.87 664,691.87 664.19,691.87 673.84,682.22 U4.64
SPI1_CS: J1.23 U4.66 | length 696.2
  Top Layer w6: J1.23 513.78,125.78 548,160 548,624.84 591.28,668.12 U4.66
SPI1_MISO: J1.17 U4.63 | length 856.3
  Top Layer w6: J1.17 419.29,120.29 515,216 515,639 577.12,701.12 612,701.12 624.75,713.87 657.56,713.87 661.8,709.62 662.18,709.62 689.59,682.22 U4.63
SPI1_MOSI: J1.21 U4.65 | length 762.3
  Top Layer w6: J1.21 482.28,122.28 537,177 537,629.4 586.72,679.12 623.97,679.12 630.41,685.56 630.41,686.03 636.25,691.87 648.44,691.87 658.09,682.22 U4.65
TXD: J1.10 U4.48 U6.9 | length 1837.5
  Top Layer w6: v1(924,635) 925.81,636.81 U4.48 925.81,682.22 937.28,693.68 987.68,693.68 998.68,704.68 U6.9
  Bottom Layer w6: J1.10 183.07,149.37 2,330.44 2,635.56 114.3,747.86 831.54,747.86 924,655.4 v1(924,635)
USB_ID: R9.2 U4.47 USB1.4 | length 1674.4
  Top Layer w6: USB1.4 124.74,1056.74 183.01,1115.01 323.99,1115.01 436,1003 669,1003 781.01,1115.01 986.99,1115.01 1053.33,1048.67 R9.2 1009.9,675.12 979.15,644.37 945.07,644.37 941.56,647.88 U4.47
USB_N: J1.14 U4.68 USB1.2 | length 1577.4
  Top Layer w6: v1(175,1022) 175.46,1021.54 175.46,975.58 USB1.2 ; v1(577,630) 586.13,620.87 U4.68
  Signal & VCC w6: v1(175,1022) 182,1015 182,728.16 280.16,630 v1(577,630)
  Bottom Layer w6: J1.14 246.06,381.22 494.84,630 v1(577,630)
USB_P: J1.16 U4.69 USB1.3 | length 1670.6
  Top Layer w6: USB1.3 150.67,975.45 150.67,1046.67 v1(151,1047) ; v1@568,607 567.02,607.98 v1(566.9,607.98) 608,607.98 U4.69
  Signal & VCC w6: v1(151,1047) 151,939.83 141,929.83 141,669.44 202.47,607.98 v1(566.9,607.98)
  Bottom Layer w6: J1.16@277.56,55.12 277.56,397.16 488.37,607.98 v1(566.9,607.98)
pads on no net: J1.5 J1.6 J1.7 J1.8 U4.72 U4.75 U4.76 U4.77 U4.78 U4.79 U4.84 U4.85 U4.86 U6.4 U6.5 U6.6 USB2.4

## Polygon pours and split planes (outlines as drawn)
GND on GND (split plane): 430.16,1110.17 432.78,1102.85 436.1,1095.83 440.09,1089.17 444.72,1082.93 449.94,1077.17 455.69,1071.96 461.93,1067.33 468.59,1063.34 475.62,1060.02 482.93,1057.4 490.46,1055.51 498.15,1054.37 505.91,1053.99 513.66,1054.37 521.35,1055.51 528.88,1057.4 536.19,1060.02 543.22,1063.34 549.88,1067.33 556.12,1071.96 561.87,1077.17 567.09,1082.93 571.72,1089.17 575.71,1095.83 579.03,1102.85 581.65,1110.17 582.37,1113.05 1076.36,1113.05 1076.36,146.08 1043.31,146.08 1042.94,146.04 1042.42,146.02 1041.88,146.03 1041.49,145.96 1037.53,145.74 1031.83,144.77 1026.27,143.17 1020.93,140.96 1015.87,138.16 1011.15,134.81 1006.84,130.96 1002.98,126.65 999.64,121.93 996.84,116.87 994.62,111.52 993.02,105.97 992.05,100.26 991.83,96.31 991.76,95.91 991.78,95.37 991.75,94.87 991.71,94.49 991.71,20.1 403.96,20.1 403.96,127.95 403.91,128.4 403.62,133.51 402.69,138.99 401.15,144.34 399.02,149.48 396.33,154.34 393.11,158.88 389.41,163.03 385.26,166.74 380.72,169.95 375.85,172.65 370.71,174.77 365.37,176.31 359.88,177.25 354.33,177.56 348.78,177.25 343.29,176.31 337.95,174.77 332.81,172.65 327.94,169.95 323.4,166.74 319.25,163.03 315.55,158.88 312.33,154.34 309.64,149.48 307.51,144.34 305.97,138.99 305.04,133.51 304.75,128.4 304.71,127.95 304.71,20.1 20.1,20.1 20.1,94.49 20.06,94.88 20.05,95.1 20.07,95.58 19.99,96.07 19.76,100.26 18.79,105.97 17.19,111.52 14.97,116.87 12.18,121.93 8.83,126.65 4.97,130.96 0.66,134.81 -4.06,138.16 -9.12,140.96 -14.46,143.17 -20.02,144.77 -25.72,145.74 -30.01,145.98 -30.52,146.06 -30.96,146.04 -31.13,146.04 -31.5,146.08 -64.55,146.08 -64.55,1113.05 429.44,1113.05

## Silkscreen, mask and mechanical layers (free items; w line width, h text height)
Mechanical 1:
  lines w10: -84.65,200.79 -84.65,1133.14 446.85,1133.14 ccw(c505.91,1133.14) 564.96,1133.14 1096.46,1133.14 ; 1096.46,200.79 1096.46,1131.99